# EAGLE board atx_power_control (EAGLE 9.6.1)
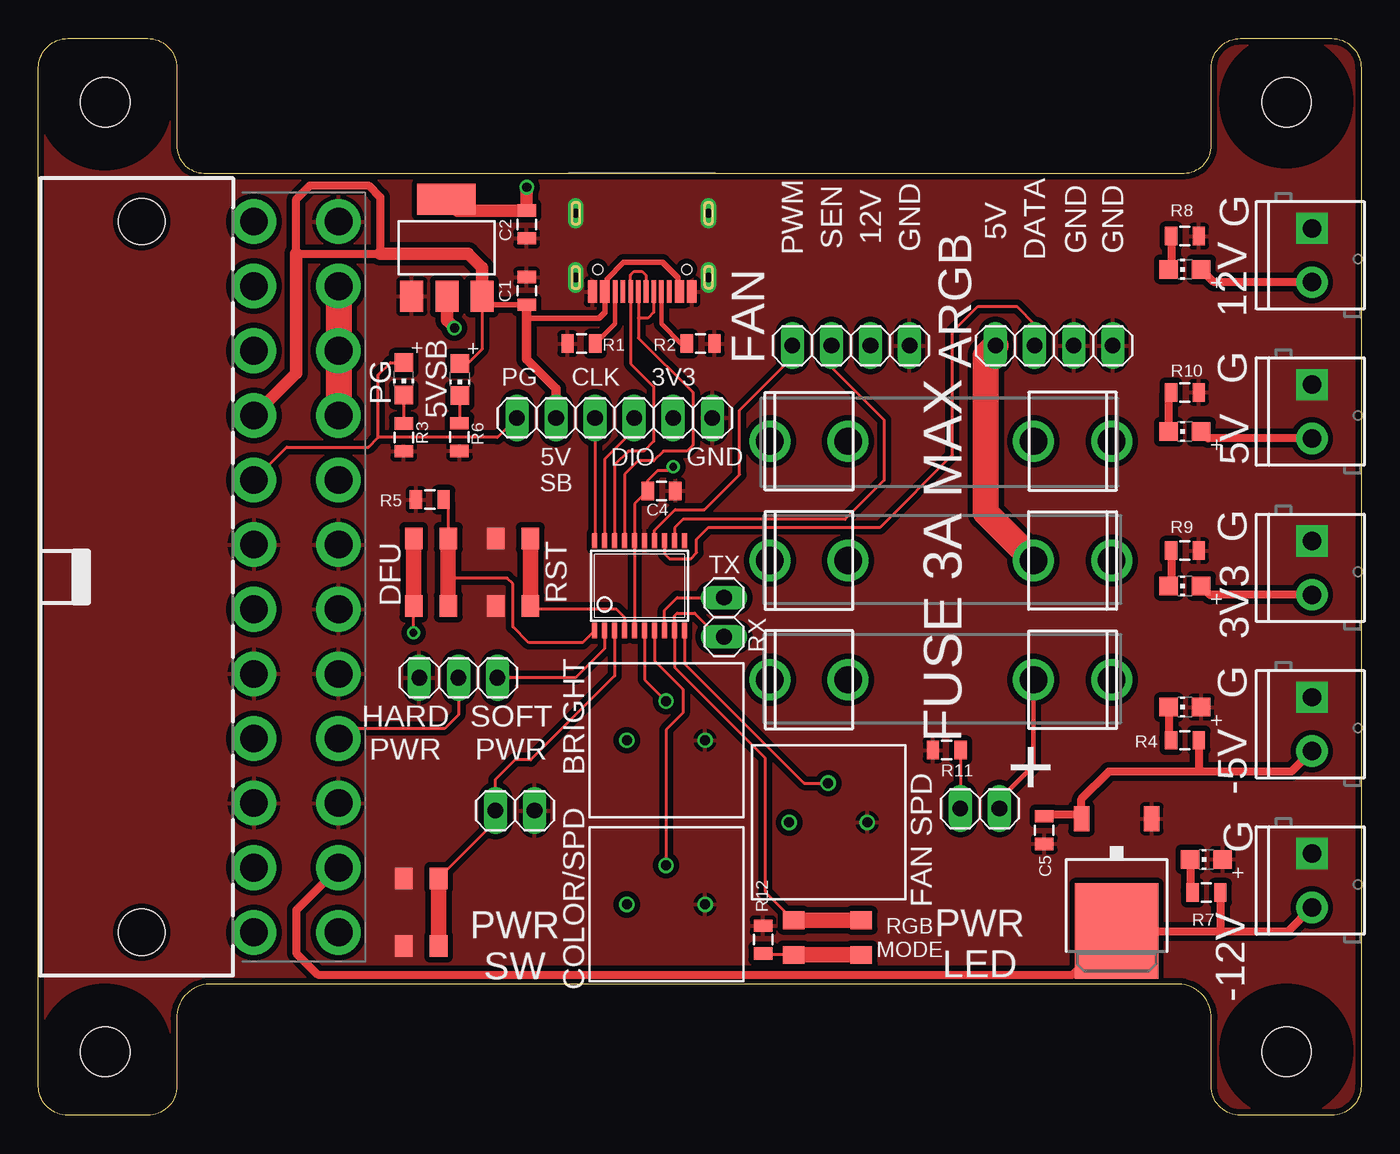
[diagram p0: board, top side]
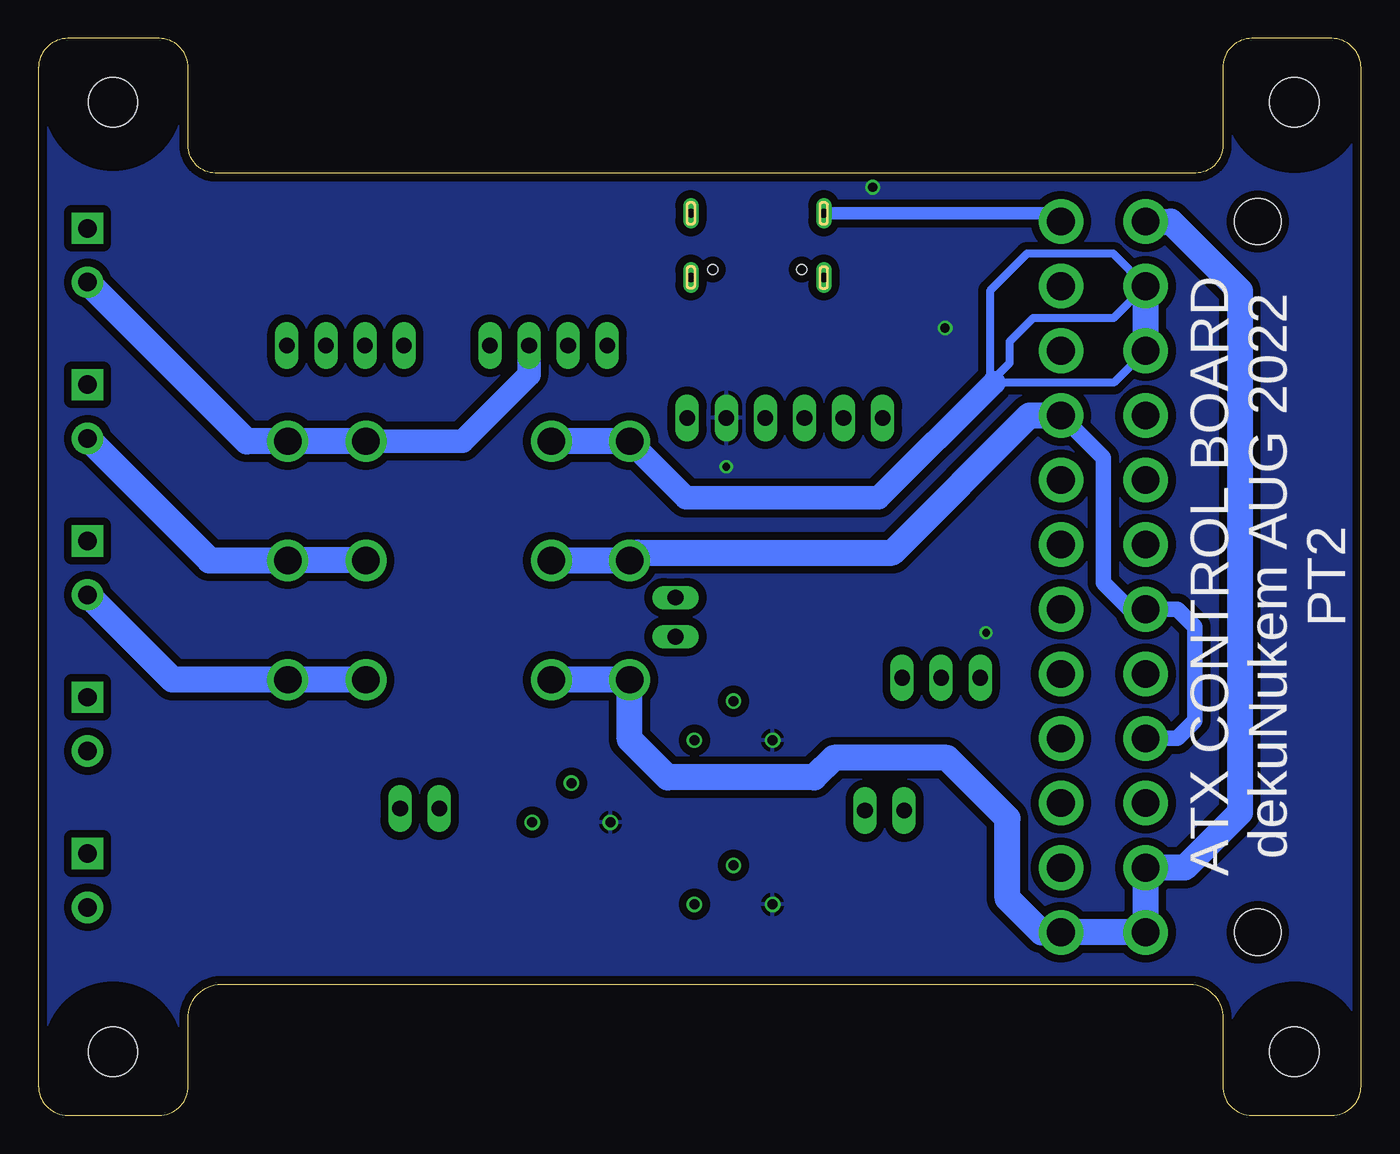
[diagram p1: board, bottom side, seen from below]

Size 86 x 70 mm. Coordinates in mm from the lower left corner, seen from the top.
Outline: 76.25,1.91 76.25,6.09 arc90 74.35,8.51 10.9,8.51 arc90 9,6.09 9,1.91 arc-90 7.09,0 1.91,0 arc-90 0,1.91 0,68.09 arc-90 1.91,70 7.09,70 arc-90 9,68.09 9,62.91 arc90 10.9,61.25 74.35,61.25 arc90 76.25,62.91 76.25,68.09 arc-90 78.16,70 84.09,70 arc-90 86,68.09 86,1.91 arc-90 84.09,0 78.16,0 arc-90 76.25,1.91
Copper layers (1*16): Top 0.035mm / dielectric 1.5mm / Bottom 0.035mm
Design rules "deku_2layer_6mil": minimum track width 6mil, minimum drill 15mil, track to track 6mil, track to pad 6mil, pad to pad 6mil, via to via 6mil, smd to smd 6mil, copper to edge 10mil, drill to drill 6mil, minimum pad ring 7mil, minimum via ring 7mil, stop-mask expansion 4mil, vias tented up to drill 25mil, thermal gap 10mil
tRestrict: area 0.3,0.2 to 8.3,8.2; area 0.3,61.8 to 8.3,69.8; area 77.2,61.9 to 85.2,69.9; area 77.2,0.2 to 85.2,8.2
bRestrict: area 0.3,0.2 to 8.3,8.2; area 77.2,0.2 to 85.2,8.2; area 0.3,61.8 to 8.3,69.8; area 77.2,61.9 to 85.2,69.9

## Footprints (pad centres in the part's own frame; a part is rotated, then mirrored left to right if it is on the bottom)
0805@1 = smd 0.8 x 1.2: 1 -0.9,0; 2 0.9,0
FUSE_5MM = drill 1.778: 1 0,-11.113; 2 0,-6.032; 3 0,6.032; 4 0,11.113
SOT223 = smd 1.499 x 2.007: 1 -2.261,-3.15; 2 0.025,-3.15; 3 2.311,-3.15 | smd 3.81 x 2.007: 4 0,3.15
TSSOP20 = smd 0.305 x 0.991: 1 -2.925,-2.918; 2 -2.275,-2.918; 3 -1.625,-2.918; 4 -0.975,-2.918; 5 -0.325,-2.918; 6 0.325,-2.918; 7 0.975,-2.918; 8 1.625,-2.918; 9 2.275,-2.918; 10 2.925,-2.918; 11 2.925,2.918; 12 2.275,2.918; 13 1.625,2.918; 14 0.975,2.918; 15 0.325,2.918; 16 -0.325,2.918; 17 -0.975,2.918; 18 -1.625,2.918; 19 -2.275,2.918; 20 -2.925,2.918
ADAFRUIT_TO252 = smd 1 x 1.6: 1 -2.28,-4.8; 2 2.28,-4.8 | smd 5.4 x 6.2: 3 0,2.5
ATX24_RIGHT_ANGLE = drill 1.8 pad 2.9: 1 23.1,4.76; 2 18.9,4.76; 3 14.7,4.76; 4 10.5,4.76; 5 6.3,4.76; 6 2.1,4.76; 7 -2.1,4.76; 8 -6.3,4.76; 9 -10.5,4.76; 10 -14.7,4.76; 11 -18.9,4.76; 12 -23.1,4.76; 13 23.1,10.26; 14 18.9,10.26; 15 14.7,10.26; 16 10.5,10.26; 17 6.3,10.26; 18 2.1,10.26; 19 -2.1,10.26; 20 -6.3,10.26; 21 -10.5,10.26; 22 -14.7,10.26; 23 -18.9,10.26; 24 -23.1,10.26 | hole 3: -23.1,-2.54; 23.1,-2.54
SCREWTERMINAL-3.5MM-2 = drill 1.2 pad 2.032 square: 1 0,0 | drill 1.2 pad 2.032: 2 3.5,0
1X02 = drill 1.016 long: 1 -1.27,0; 2 1.27,0
1X04 = drill 1.016 long: 1 -3.81,0; 2 -1.27,0; 3 1.27,0; 4 3.81,0
1X03 = drill 1.016 long: 1 -2.54,0; 2 0,0; 3 2.54,0
CHIP-LED0805 = smd 1.2 x 1.2: A 0,-1.05; C 0,1.05
0805 = smd 0.8 x 1.2: 1 -0.9,0; 2 0.9,0
342_SWICH_FOOT = smd 1.4 x 1.15: P$1 -2.2,-1.125; P$2 -2.2,1.125; P$3 2.2,1.125; P$4 2.2,-1.125
USBC_16P_FOOT = smd 0.6 x 1.45: A1B12 -3.225,3.848; A4B9 -2.425,3.848; B4A9 2.425,3.848; B11A12 3.225,3.848 | smd 0.3 x 1.45: A5 -1.25,3.848; A6 -0.25,3.848; A7 0.25,3.848; A8 1.25,3.848; B5 1.75,3.848; B6 0.75,3.848; B7 -0.75,3.848; B8 -1.75,3.848 | drill 0.6 pad 1 long: P$13 -4.32,2.933; P$14 4.32,2.933; P$15 -4.32,-1.248; P$16 4.32,-1.248 | hole 0.65: -2.89,2.402; 2.89,2.402
M3_MOUNTING_HOLE_PACK = hole 3.2: 0,0
3386P = drill 0.65: A 2.5,0; B 7.58,0; W 5.04,-2.54

## Placement (x,y rotation side)
C1  1uF  [0805@1]  31.75,53.59 270 top
C2  1uF  [0805@1]  31.75,57.91 90 top
C4  1uF  [0805@1]  40.51,40.6 180 top
C5  1uF  [0805@1]  65.41,18.54 90 top
F1  FUSEX20MM  [FUSE_5MM]  58.67,36.07 270 top
F2  FUSEX20MM  [FUSE_5MM]  58.67,43.81 90 top
F3  FUSEX20MM  [FUSE_5MM]  58.67,28.32 270 top
IC2  REG1117  [SOT223]  26.53,56.39 0 top
IC3  STM32F042F4  [TSSOP20]  39.09,34.43 0 top
IC4  MY_7905DT  [ADAFRUIT_TO252]  70.1,14.48 180 top
J1  ATX24RH  [ATX24_RIGHT_ANGLE]  9.25,35 270 top
J2  [SCREWTERMINAL-3.5MM-2]  82.8,37.34 270 top
J3  [SCREWTERMINAL-3.5MM-2]  82.8,17.02 270 top
J4  [SCREWTERMINAL-3.5MM-2]  82.8,27.18 270 top
J6  [SCREWTERMINAL-3.5MM-2]  82.8,57.66 270 top
J7  [SCREWTERMINAL-3.5MM-2]  82.8,47.5 270 top
JP1  [1X02]  61.21,19.94 180 top
JP2  [1X04]  52.83,50.04 0 top
JP3  [1X02]  32.38,45.34 0 top
JP4  [1X02]  44.58,32.38 90 top
JP5  [1X03]  27.3,28.45 180 top
JP6  [1X02]  30.99,19.81 180 top
JP7  [1X04]  66.04,50.04 0 top
JP8  [1X04]  40.01,45.34 0 top
LED1  [CHIP-LED0805]  74.55,26.54 90 top
LED2  [CHIP-LED0805]  27.4,47.83 180 top
LED3  [CHIP-LED0805]  23.75,47.88 180 top
LED4  [CHIP-LED0805]  75.95,16.64 90 top
LED5  [CHIP-LED0805]  74.55,54.99 90 top
LED6  [CHIP-LED0805]  74.55,34.42 90 top
LED7  [CHIP-LED0805]  74.55,44.45 90 top
R1  5.1K  [0805]  35.31,50.16 180 top
R2  5.1K  [0805]  43.05,50.16 0 top
R3  1K  [0805]  23.75,44.07 90 top
R4  1K  [0805]  74.55,24.38 180 top
R5  5.1K  [0805]  25.45,40.03 0 top
R6  1K  [0805]  27.38,44.09 90 top
R7  5K  [0805]  75.95,14.48 180 top
R8  5K  [0805]  74.55,57.15 180 top
R9  1K  [0805]  74.55,36.7 180 top
R10  1K  [0805]  74.55,46.99 180 top
R11  1K  [0805]  59.05,23.75 0 top
R12  300  [0805]  47.12,11.43 90 top
SW1  324_SW  [342_SWICH_FOOT]  24.89,13.21 270 top
SW2  324_SW  [342_SWICH_FOOT]  51.31,11.56 180 top
SW3  324_SW  [342_SWICH_FOOT]  30.86,35.31 270 top
SW4  324_SW  [342_SWICH_FOOT]  25.53,35.31 270 top
U2  USBC_16P  [USBC_16P_FOOT]  39.26,57.39 180 top
U$1  M3_MOUNTING_HOLE  [M3_MOUNTING_HOLE_PACK]  81.15,4.14 0 top
U$2  M3_MOUNTING_HOLE  [M3_MOUNTING_HOLE_PACK]  4.35,65.86 0 top
U$3  M3_MOUNTING_HOLE  [M3_MOUNTING_HOLE_PACK]  81.15,65.86 0 top
U$4  3386P  [3386P]  45.85,24.38 180 top
U$5  3386P  [3386P]  45.85,13.72 180 top
U$6  3386P  [3386P]  56.39,19.05 180 top
U$10  M3_MOUNTING_HOLE  [M3_MOUNTING_HOLE_PACK]  4.35,4.14 0 top

## Library data of the parts
C1 C2 C4 C5 = clock
F1-F3 IC4 = atx_power_control
IC2 = clock; MPN: REG1117; OC_FARNELL: 1097566; OC_NEWARK: 14P6981
IC3 = tx
J1 = SparkFun-Connectors
J2-J4 J6 J7 = atx_power_control; PROD_ID: CONN-08399
JP1-JP8 = pinhead
LED1-LED7 = adafruit
R1 R2 R5 R12 = joyAnalog
R3 R4 R6-R11 = SparkFun-Passives
SW1-SW4 = 3pos_slide_switch_centered
U2 = my_usbc_16p
U$1-U$3 U$10 = a
U$4-U$6 = bbc_micro

## Nets
+3V3: C2.2 C4.2 IC2.2 IC2.4 IC3.5 IC3.16 JP8.3 SW4.P$1 SW4.P$4 U$4.B U$5.B U$6.B
BUTTON1: IC3.4 SW3.P$2 SW3.P$3
BUTTON2: IC3.1 R5.2 SW4.P$2 SW4.P$3
GND: C1.1 C2.1 C4.1 C5.1 IC2.1 IC3.15 IC4.1 J1.3 J1.5 J1.7 J1.15 J1.17 J1.18 J1.19 J1.24 J2.1 J3.1 J4.1 J6.1 J7.1 JP2.4 JP5.3 JP6.1 JP7.3 JP7.4 JP8.4 LED1.A LED4.A R1.2 R2.2 R3.1 R5.1 R6.1 R8.1 R9.1 R10.1 R11.1 R12.2 SW1.P$1 SW1.P$4 SW3.P$1 SW3.P$4 U2.A1B12 U2.B11A12 U2.P$13 U2.P$14 U2.P$15 U2.P$16 U$4.A U$5.A U$6.A
N$1: LED3.C R3.2
N$2: IC4.3 J1.14 J3.2 R7.1
N$3: IC3.20 JP8.1
N$4: IC3.19 JP8.2
N$5: LED1.C R4.2
N$6: IC3.12 JP2.2
N$7: IC3.14 JP2.1
N$8: LED4.C R7.2
N$9: LED5.C R8.2
N$10: F1.1 F1.2 J1.4 J1.6 J1.21 J1.22 J1.23
N$11: C5.2 IC4.2 J4.2 R4.1
N$12: F3.1 F3.2 J1.1 J1.2 J1.12 J1.13
N$13: IC3.6 U$4.W
N$14: IC3.13 JP7.2
N$15: F1.3 F1.4 J7.2 JP7.1 LED7.A
N$16: F2.1 F2.2 J6.2 JP2.3 LED5.A
N$17: JP1.2 R11.2
N$18: LED6.C R9.2
N$19: F3.3 F3.4 J2.2 JP1.1 LED6.A
N$20: LED7.C R10.2
N$21: F2.3 F2.4 J1.10 J1.11
N$22: IC3.7 U$5.W
N$23: IC3.10 U$6.W
N$24: IC3.2 JP5.1
N$25: J1.16 JP5.2
N$26: IC3.3 JP6.2 SW1.P$2 SW1.P$3
N$27: IC3.8 JP4.2
N$28: J1.8 JP3.1 LED3.A
N$29: LED2.C R6.2
N$30: IC3.9 JP4.1 SW2.P$1 SW2.P$4
N$31: R1.1 U2.B5
N$32: R12.1 SW2.P$2 SW2.P$3
N$33: R2.1 U2.A5
USB_DN: IC3.17 U2.A7 U2.B7
USB_DP: IC3.18 U2.A6 U2.B6
VCC: C1.2 IC2.3 J1.9 JP3.2 LED2.A U2.A4B9 U2.B4A9

## Tracks (layer width: path | path; a pad name or v marks a point on that pad's centre or on a via)
+3V3  (via drill 0.5, 0.6)
  Top 0.203: v24.38,31.37 24.38,33.09 SW4.P$4 | IC3.5 IC3.16 38.76,39.74 C4.2 39.61,41.26 40.26,41.91 41.02,41.91 v41.27,42.16
  Top 0.813: IC2.4 27.26,58.81 C2.2 v31.75,60.33 | IC2.2 26.56,51.67 v27.05,51.18
  Top 1.016: SW4.P$1 SW4.P$4
  pour Bottom (isolate 0.508): 0,70 86,70 86,0 0,0
BUTTON1
  Top 0.203: IC3.4 38.11,32.38 37.59,32.89 32.2,32.89 SW3.P$3
  Top 1.016: SW3.P$2 SW3.P$3
BUTTON2
  Top 0.203: IC3.1 35.38,30.73 31.88,30.73 30.86,31.75 30.86,34.54 30.48,34.92 26.78,34.92 26.65,35.05 | R5.2 26.65,39.73 SW4.P$2
  Top 1.016: SW4.P$2 26.65,35.05 SW4.P$3
GND
  Bottom 0.813: U2.P$16 20.05,58.64 J1.24
  pour Top (isolate 0.356): 0,0 86,0 86,70 0,70
N$1
  Top 0.203: LED3.C R3.2
N$2
  Top 0.508: J1.14 16.76,13.35 16.76,10.54 18.16,9.14 67.27,9.14 IC4.3 76.83,11.98 | 76.83,11.98 81.26,11.98 J3.2 | R7.1 76.85,11.99 76.83,11.98
N$3
  Top 0.203: JP8.1 36.2,37.38 IC3.20
N$4
  Top 0.203: JP8.2 38.73,44.58 36.81,42.65 IC3.19
N$5
  Top 0.508: LED1.C 73.5,24.53 R4.2
N$6
  Top 0.203: JP2.2 51.56,48.64 54.99,45.21 54.99,41.27 52.45,38.73 41.91,38.73 41.36,38.19 IC3.12
N$7
  Top 0.203: IC3.14 40.06,38.03 41.4,39.37 43.31,39.37 45.59,41.66 45.59,45.85 49.02,49.28 JP2.1
N$8
  Top 0.508: LED4.C 74.9,14.63 R7.2
N$9
  Top 0.508: R8.2 73.65,55.14 LED5.C
N$10
  Top 1.676: J1.23 J1.22 J1.21
  Bottom 1.016: J1.21 16.76,42.75 16.76,34.63 15.03,32.9 J1.6 11.95,32.9 10.79,31.75 10.79,25.65 11.95,24.5 J1.4
  Bottom 1.676: F1.2 F1.1 47.05,36.58 30.48,36.58 21.56,45.5 J1.21
N$11
  Top 0.508: J4.2 81.48,22.35 75.45,22.35 | 75.45,22.35 69.6,22.35 67.82,20.58 IC4.2 67.57,19.53 65.5,19.53 C5.2 | R4.1 75.45,22.35
N$12
  Bottom 1.676: J1.12 12.38,58.1 7.87,53.59 7.87,19.68 11.46,16.1 J1.2 J1.1 J1.13 20.78,11.9 22.99,14.1 22.99,19.3 26.92,23.24 34.29,23.24 35.56,21.97 45.09,21.97 47.56,24.45 F3.1 F3.2
N$13
  Top 0.203: IC3.6 39.41,28.32 U$4.W
N$14
  Top 0.203: IC3.13 40.71,36.51 41.02,36.2 42.42,36.2 42.8,36.58 42.8,37.47 43.56,38.23 54.74,38.23 59.44,42.93 59.44,50.93 61.09,52.58 63.63,52.58 64.77,51.44 JP7.2
N$15
  Top 0.508: J7.2 76.05,44 LED7.A
  Top 1.676: F1.3 61.59,39.18 61.59,49.4 JP7.1
  Bottom 1.676: F1.3 F1.4 74.87,36.07 J7.2
N$16
  Top 0.508: J6.2 76.43,54.16 LED5.A
  Bottom 1.524: JP2.3 54.1,48.13 58.42,43.81 F2.2
  Bottom 1.676: F2.2 F2.1 72.46,43.81 J6.2
N$17
  Top 0.203: R11.2 59.95,19.95 JP1.2
N$18
  Top 0.508: R9.2 73.65,34.57 LED6.C
N$19
  Top 0.305: F3.3 64.71,22.73 62.48,20.51 JP1.1
  Top 0.508: J2.2 76.18,33.84 LED6.A
  Bottom 1.676: F3.3 F3.4 77.29,28.32 J2.2
N$20
  Top 0.508: LED7.C 73.5,46.84 R10.2
N$21
  Bottom 0.508: J1.10 16.09,47.62 23.88,47.62 24.13,47.62 | 24.13,47.62 24.13,53.59 21.72,56.01 16.12,56.01 J1.11 16.1,51.82 21.34,51.82 22.86,50.29 22.86,48.9 24.13,47.62
  Bottom 1.524: F2.4 43.88,40.13 31.37,40.13 23.88,47.62
  Bottom 1.676: J1.11 J1.10 | F2.4 F2.3
N$22
  Top 0.203: IC3.7 40.06,29.54 41.91,27.69 41.91,26.16 40.81,25.06 U$5.W
N$23
  Top 0.203: IC3.10 42.01,29.36 49.78,21.59 U$6.W
N$24
  Top 0.203: IC3.2 36.81,30.33 34.92,28.45 JP5.1
N$25
  Top 0.203: JP5.2 27.3,26.04 26.41,25.14 20.15,25.14 J1.16
N$26
  Top 0.203: IC3.3 37.46,28.57 32,23.11 30.99,23.11 29.72,21.84 JP6.2 29.72,19.11 SW1.P$2
  Top 1.016: SW1.P$3 SW1.P$2
N$27
  Top 0.203: IC3.8 40.71,32.84 41.53,33.66 JP4.2
N$28
  Top 0.203: J1.8 16.15,43.43 21.46,43.43 22.1,44.07 | 22.1,44.07 22.1,48.13 22.89,48.93 LED3.A | JP3.1 29.84,44.07 22.1,44.07
N$29
  Top 0.203: LED2.C 27.4,45.01 R6.2
N$30
  Top 0.203: SW2.P$4 47.24,14.55 47.24,23.24 41.36,29.12 IC3.9 41.36,32.47 41.53,32.64 42.67,32.64 44.2,31.11 JP4.1
  Top 1.016: SW2.P$4 SW2.P$1
N$31
  Top 0.305: U2.B5 37.51,51.47 R1.1
N$32
  Top 0.203: SW2.P$3 47.22,10.43 R12.1
  Top 1.016: SW2.P$3 SW2.P$2
N$33
  Top 0.305: U2.A5 40.51,51.44 41.78,50.16 R2.1
USB_DN
  Top 0.203: U2.B7 40.01,52.2 39.62,51.82 39.01,51.82 U2.A7 39.01,50.53 42.55,46.99 42.55,43.56 42.16,43.18 40.64,43.18 40.01,42.55 38.99,42.55 38.11,41.67 IC3.17
USB_DP
  Top 0.203: U2.A6 39.51,54.6 39.24,54.86 38.73,54.86 38.51,54.64 U2.B6 38.51,48.87 40.01,47.37 40.01,43.81 39.37,43.18 38.35,43.18 37.46,42.29 IC3.18
VCC
  Top 0.203: IC2.3 28.84,49.8 27.93,48.88 LED2.A
  Top 0.356: U2.A4B9 41.58,53.65 41.58,54.46 40.59,55.45 38.05,55.45 36.96,54.36 36.96,53.67 U2.B4A9 36.83,52.2 36.45,51.82 31.88,51.82 31.75,51.94 | C1.2 29.39,52.69 IC2.3
  Top 0.508: 16.76,55.88 16.76,59.56 17.65,60.45 21.46,60.45 22.23,59.69 22.23,56.01 16.76,56.01
  Top 0.61: JP3.2 33.66,47.24 31.75,49.15 31.75,51.94 C1.2
  Top 0.813: J1.9 16.76,48.25 16.76,55.88 16.76,56.01 | 22.23,56.01 27.94,56.01 28.84,55.1 IC2.3

## Text on the board
tNames: G | PWM | SEN | 12V | GND | 5V | DATA | GND | GND | 12V | ARGB | FAN | G | PG | 5VSB | PG | CLK | 3V3 | 5V | DIO | GND | 5V / SB | G | TX | FUSE 3A MAX | DFU | RST | 3V3 | RX | G | BRIGHT | HARD / PWR | SOFT / PWR | + | -5V | FAN SPD | G | COLOR/SPD | RGB / MODE | PWR / SW | PWR / LED | -12V
bNames: ATX CONTROL BOARD / dekuNukem AUG 2022 / PT2